# EAGLE board Waveform_Gen_V1.0 (EAGLE 9.0.1)
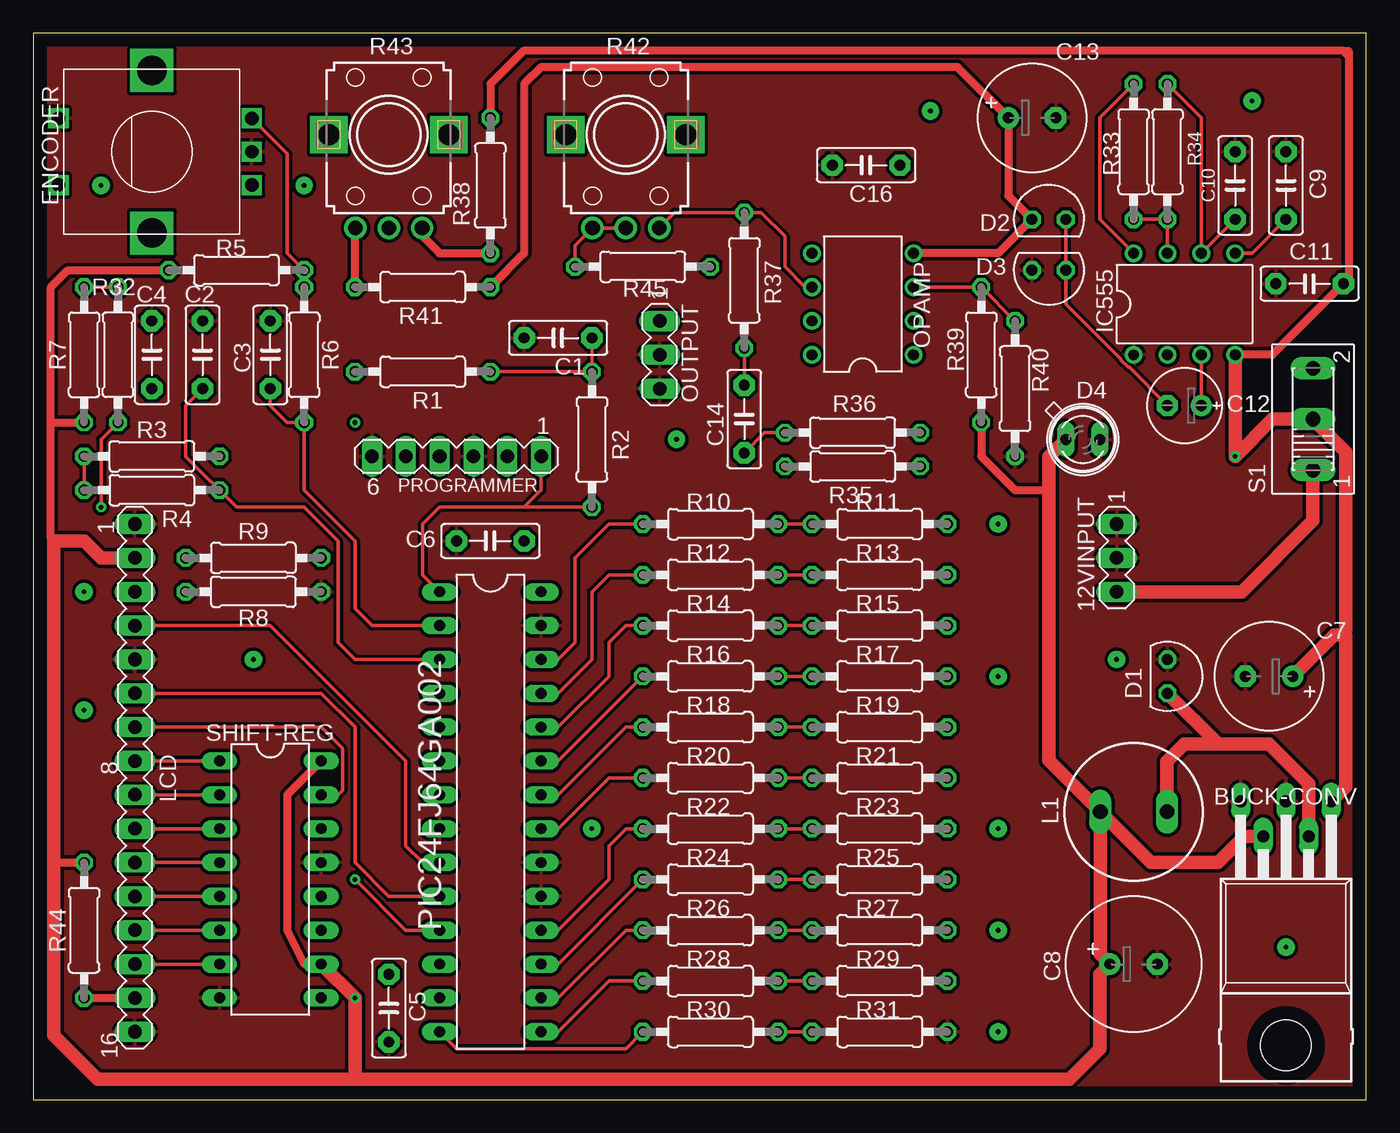
[diagram p0: board, top side]
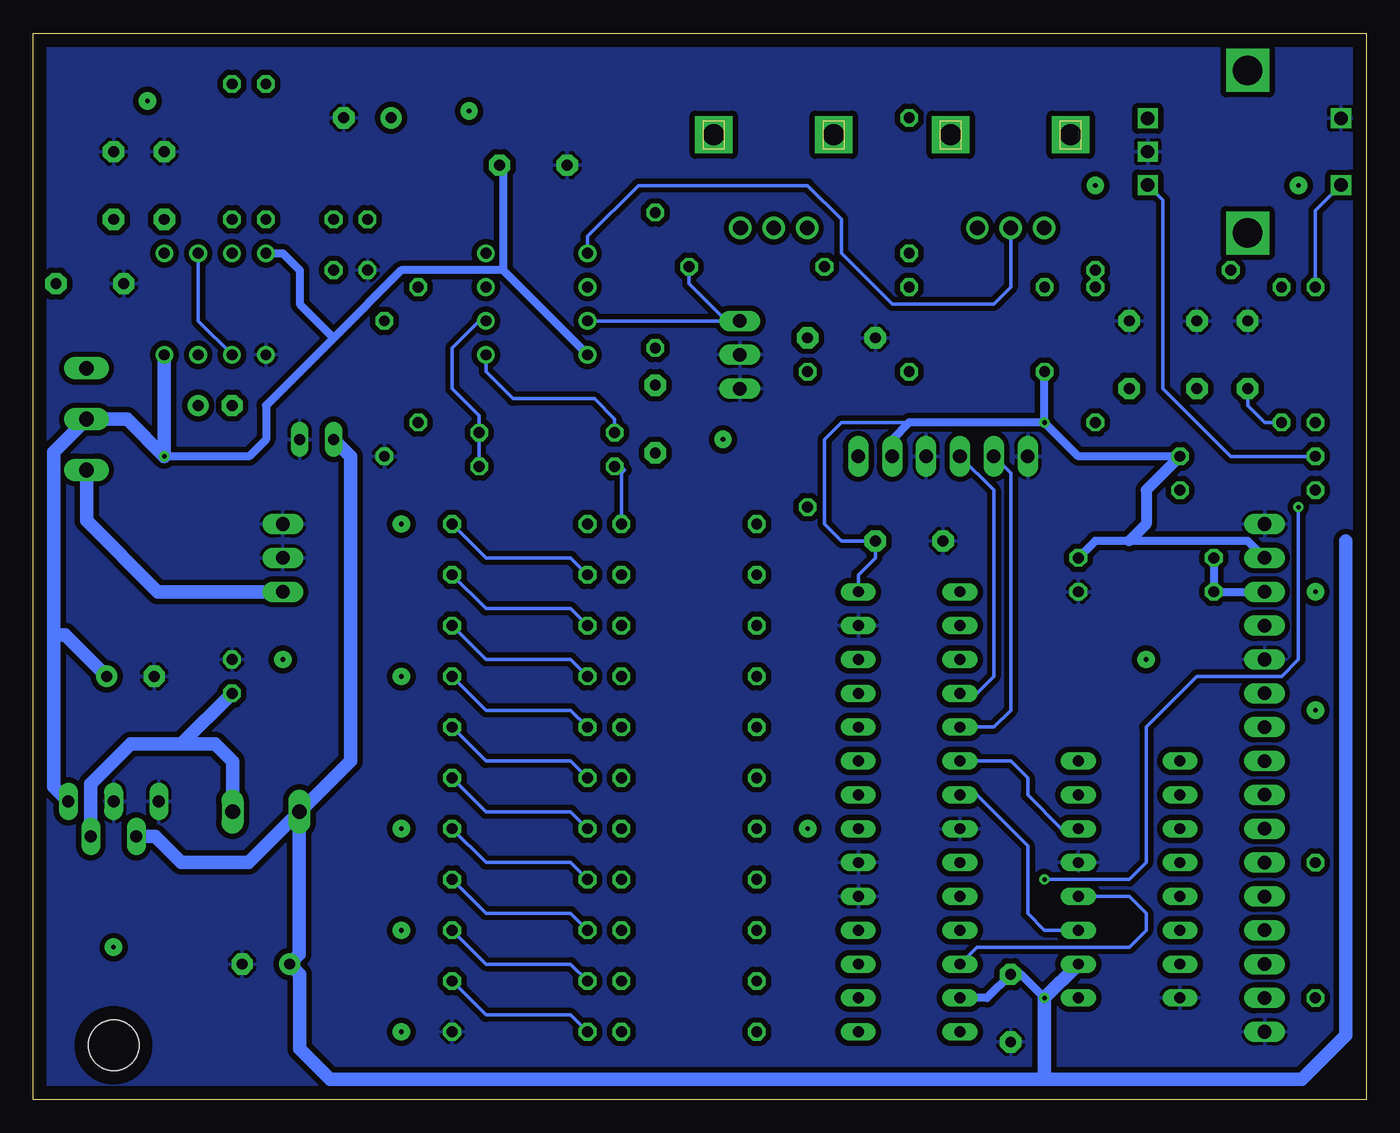
[diagram p1: board, bottom side, seen from below]

Size 100 x 80 mm. Coordinates in mm from the lower left corner, seen from the top.
Outline: 0,0 100,0 100,80 0,80 0,0
Copper layers (1*16): Top 0.035mm / dielectric 1.5mm / Bottom 0.035mm
Design rules "default": minimum track width 6mil, minimum drill 0.35mm, track to track 6mil, track to pad 6mil, pad to pad 6mil, via to via 6mil, smd to smd 6mil, copper to edge 40mil, drill to drill 6mil, minimum pad ring 10mil, minimum via ring 8mil, stop-mask expansion 4mil, vias tented up to drill 0mil, thermal gap 10mil

## Footprints (pad centres in the part's own frame; a part is rotated, then mirrored left to right if it is on the bottom)
MA03-1 = drill 1.016 long: 1 -2.54,0; 2 0,0; 3 2.54,0
TO220-52 = drill 0.9 long: 1 -3.4,-21.1; 2 -1.7,-18.47; 3 0,-21.1; 4 1.7,-18.47; 5 3.4,-21.1 | hole 3.8: 0,-2.8
C5B2.5 = drill 0.813 pad 1.6 octagon: 1 -2.54,0; 2 2.54,0
E3,5-8 = drill 0.813 pad 1.6: + -1.778,0 | drill 0.813 pad 1.6 octagon: - 1.778,0
E3,5-10 = drill 0.813 pad 1.6: + -1.778,0 | drill 0.813 pad 1.6 octagon: - 1.778,0
E2,5-6E = drill 0.813 pad 1.575: + -1.27,0 | drill 0.813 pad 1.575 octagon: - 1.27,0
TO92H = drill 0.813 octagon: 1 -1.27,0; 2 1.27,0
SFH482 = drill 0.813 long: A -1.27,0; K 1.27,0
ALPS_EC12E_SW = drill 1 square: A -2.5,-7.5; B 2.5,-7.5; C 0,-7.5; D -2.5,7; E 2.5,7 | drill 2.2 square: GND1 -6.1,0; GND2 6.1,0
DIL08 = drill 0.813 pad 1.27: 1 -3.81,-3.81; 2 -1.27,-3.81; 3 1.27,-3.81; 4 3.81,-3.81; 5 3.81,3.81; 6 1.27,3.81; 7 -1.27,3.81; 8 -3.81,3.81
SD12K100 = drill 1.1 long: 1 -2.5,0; 2 2.5,0
SIL16 = drill 1.016 long: 1 -24.13,0; 2 -21.59,0; 3 -19.05,0; 4 -16.51,0; 5 -13.97,0; 6 -11.43,0; 7 -8.89,0; 8 -6.35,0; 9 -3.81,0; 10 -1.27,0; 11 1.27,0; 12 3.81,0; 13 6.35,0; 14 8.89,0; 15 11.43,0; 20 13.97,0
DIL28-3 = drill 0.813 long: 1 -16.51,-3.81; 2 -13.97,-3.81; 3 -11.43,-3.81; 4 -8.89,-3.81; 5 -6.35,-3.81; 6 -3.81,-3.81; 7 -1.27,-3.81; 8 1.27,-3.81; 9 3.81,-3.81; 10 6.35,-3.81; 11 8.89,-3.81; 12 11.43,-3.81; 13 13.97,-3.81; 14 16.51,-3.81; 15 16.51,3.81; 16 13.97,3.81; 17 11.43,3.81; 18 8.89,3.81; 19 6.35,3.81; 20 3.81,3.81; 21 1.27,3.81; 22 -1.27,3.81; 23 -3.81,3.81; 24 -6.35,3.81; 25 -8.89,3.81; 26 -11.43,3.81; 27 -13.97,3.81; 28 -16.51,3.81
MA06-1 = drill 1.016 long: 1 -6.35,0; 2 -3.81,0; 3 -1.27,0; 4 1.27,0; 5 3.81,0; 6 6.35,0
0207/10 = drill 0.813 octagon: 1 -5.08,0; 2 5.08,0
EVUF = drill 1.1 pad 1.676: 1 -2.5,-7; 2 0,-7; 3 2.5,-7 | drill 1.6 pad 2.8 square: M1 4.5,0; M2 -4.5,0
255SB = drill 1.118 long: 1 -3.81,0; 2 0,0; 3 3.81,0
DIL16 = drill 0.813 long: 1 -8.89,-3.81; 2 -6.35,-3.81; 3 -3.81,-3.81; 4 -1.27,-3.81; 5 1.27,-3.81; 6 3.81,-3.81; 7 6.35,-3.81; 8 8.89,-3.81; 9 8.89,3.81; 10 6.35,3.81; 11 3.81,3.81; 12 1.27,3.81; 13 -1.27,3.81; 14 -3.81,3.81; 15 -6.35,3.81; 16 -8.89,3.81

## Placement (x,y rotation side)
12VINPUT  [MA03-1]  81.28,40.64 270 top
BUCK-CONV  [TO220-52]  93.98,1.27 180 top
C1  0.1 uF 50V  [C5B2.5]  39.37,57.15 180 top
C2  0.1 uF 50V  [C5B2.5]  12.7,55.88 90 top
C3  [C5B2.5]  17.78,55.88 90 top
C4  0.1 uF 50V  [C5B2.5]  8.89,55.88 90 top
C5  0.1 uF 50V  [C5B2.5]  26.67,6.86 270 top
C6  0.1 uF 50V  [C5B2.5]  34.29,41.91 180 top
C7  100uF  [E3,5-8]  92.71,31.75 180 top
C8  330uF  [E3,5-10]  82.55,10.16 0 top
C9  100nF  [C5B2.5]  93.98,68.58 90 top
C10  10nF  [C5B2.5]  90.17,68.58 90 top
C11  10nF  [C5B2.5]  95.76,61.21 180 top
C12  10uF  [E2,5-6E]  86.36,52.07 180 top
C13  100uF  [E3,5-8]  74.93,73.66 0 top
C14  0.1 uF 50V  [C5B2.5]  53.34,51.05 90 top
C16  10nF  [C5B2.5]  62.48,70.1 180 top
D1  [TO92H]  85.09,31.75 270 top
D2  [TO92H]  76.2,66.04 0 top
D3  [TO92H]  76.2,62.23 180 top
D4  [SFH482]  78.74,49.53 0 top
ENCODER  [ALPS_EC12E_SW]  8.89,71.12 90 top
IC555  [DIL08]  86.36,59.69 0 top
L1  330uH  [SD12K100]  82.55,21.59 180 top
LCD  LCD_PIN  [SIL16]  7.62,19.05 270 top
OPAMP  LM6178LMN  [DIL08]  62.23,59.69 90 top
OUTPUT  [MA03-1]  46.99,55.88 270 top
PIC24FJ64GA002  [DIL28-3]  34.29,21.59 270 top
PROGRAMMER  [MA06-1]  31.75,48.26 180 top
R1  10K  [0207/10]  29.21,54.61 180 top
R2  330  [0207/10]  41.91,49.53 270 top
R3  10K  [0207/10]  8.89,48.26 0 top
R4  10K  [0207/10]  8.89,45.72 180 top
R5  10K  [0207/10]  15.24,62.23 180 top
R6  10K  [0207/10]  20.32,55.88 90 top
R7  10K  [0207/10]  3.81,55.88 270 top
R8  TBD  [0207/10]  16.51,38.1 0 top
R9  TBD  [0207/10]  16.51,40.64 180 top
R10  20K  [0207/10]  50.8,43.18 180 top
R11  10K  [0207/10]  63.5,43.18 180 top
R12  20K  [0207/10]  50.8,39.37 180 top
R13  10K  [0207/10]  63.5,39.37 180 top
R14  20K  [0207/10]  50.8,35.56 180 top
R15  10K  [0207/10]  63.5,35.56 180 top
R16  20K  [0207/10]  50.8,31.75 180 top
R17  10K  [0207/10]  63.5,31.75 180 top
R18  20K  [0207/10]  50.8,27.94 180 top
R19  10K  [0207/10]  63.5,27.94 180 top
R20  20K  [0207/10]  50.8,24.13 180 top
R21  10K  [0207/10]  63.5,24.13 180 top
R22  20K  [0207/10]  50.8,20.32 180 top
R23  10K  [0207/10]  63.5,20.32 180 top
R24  20K  [0207/10]  50.8,16.51 180 top
R25  10K  [0207/10]  63.5,16.51 180 top
R26  20K  [0207/10]  50.8,12.7 180 top
R27  10K  [0207/10]  63.5,12.7 180 top
R28  20K  [0207/10]  50.8,8.89 180 top
R29  10K  [0207/10]  63.5,8.89 180 top
R30  20K  [0207/10]  50.8,5.08 180 top
R31  20K  [0207/10]  63.5,5.08 180 top
R32  10K  [0207/10]  6.35,55.88 90 top
R33  5.6K  [0207/10]  82.55,71.12 270 top
R34  47K  [0207/10]  85.09,71.12 270 top
R35  10K  [0207/10]  61.47,47.5 180 top
R36  2K  [0207/10]  61.47,50.04 0 top
R37  20K  [0207/10]  53.34,61.47 270 top
R38  20K  [0207/10]  34.29,68.58 90 top
R39  40K  [0207/10]  71.12,55.88 270 top
R40  10K  [0207/10]  73.66,53.34 90 top
R41  20K  [0207/10]  29.21,60.96 180 top
R42  200K POT  [EVUF]  44.45,72.39 0 top
R43  200K POT  [EVUF]  26.67,72.39 0 top
R44  10K  [0207/10]  3.81,12.7 270 top
R45  1K  [0207/10]  45.72,62.48 0 top
S1  [255SB]  96.01,51.05 90 top
SHIFT-REG  74HC595  [DIL16]  17.78,16.51 270 top

## Library data of the parts
12VINPUT OUTPUT PROGRAMMER = con-lstb; OC_FARNELL: unknown; OC_NEWARK: unknown
BUCK-CONV = linear
C1-C6 C9-C11 C14 C16 = capacitor-wima
C7 C8 C12 C13 = rcl; SPICEPREFIX: C
D1-D3 = diode
D4 = led
ENCODER = switch-alps; MPN: EC12E2424407; OC_FARNELL: 1520813; OC_NEWARK: 74M1068
IC555 LCD OPAMP SHIFT-REG = Waveform_Gen_V1.0
L1 = inductor-neosid; OC_FARNELL: unknown; OC_NEWARK: unknown
PIC24FJ64GA002 = Waveform_Gen_V1.0; MPN: PIC24FJ64GA002-I/SP; OC_FARNELL: 1332298; OC_NEWARK: 88K6132
R1-R41 R44 R45 = eagle-ltspice; SPICEMODEL: NONE; SPICEPREFIX: R
R42 R43 = pot
S1 = switch

## Nets
+5V: BUCK-CONV.4 C5.1 C6.1 C8.+ D4.A L1.2 LCD.2 PIC24FJ64GA002.13 PIC24FJ64GA002.28 PROGRAMMER.2 R1.2 R3.2 R5.2 R7.2 R9.1 R39.2 R44.1 SHIFT-REG.10 SHIFT-REG.16
+12V: BUCK-CONV.1 C7.+ C11.1 C16.1 IC555.4 IC555.8 OPAMP.8 R33.1 R38.2 S1.2
-12V: C13.+ D2.1 OPAMP.4 R41.1
GND: 12VINPUT.1 12VINPUT.2 BUCK-CONV.3 BUCK-CONV.5 C1.2 C2.2 C3.2 C4.2 C5.2 C6.2 C7.- C8.- C9.2 C10.2 C11.2 C13.- C16.2 D1.1 D3.2 D4.K ENCODER.C ENCODER.E IC555.1 LCD.1 LCD.5 LCD.20 OUTPUT.2 OUTPUT.3 PIC24FJ64GA002.8 PIC24FJ64GA002.19 PIC24FJ64GA002.20 PIC24FJ64GA002.27 PROGRAMMER.3 PROGRAMMER.6 R8.2 R31.1 R40.1 SHIFT-REG.8 SHIFT-REG.13
N$1: PIC24FJ64GA002.7 SHIFT-REG.11
N$2: PIC24FJ64GA002.6 SHIFT-REG.14
N$3: PIC24FJ64GA002.12 SHIFT-REG.12
N$4: R42.1 R42.2 R45.1
N$5: C3.1 PIC24FJ64GA002.2 R6.1
N$6: ENCODER.A R3.1 R4.2
N$7: PIC24FJ64GA002.1 PROGRAMMER.1 R2.2
N$8: C1.1 R1.1 R2.1
N$9: ENCODER.D R7.1 R32.2
N$10: PIC24FJ64GA002.26 R10.2
N$11: C2.1 PIC24FJ64GA002.3 R4.1
N$12: ENCODER.B R5.1 R6.2
N$13: C4.1 PIC24FJ64GA002.11 R32.1
N$14: PIC24FJ64GA002.4 PROGRAMMER.4
N$15: PIC24FJ64GA002.5 PROGRAMMER.5
N$17: R10.1 R11.2 R35.2
N$18: PIC24FJ64GA002.25 R12.2
N$19: R11.1 R12.1 R13.2
N$20: R13.1 R14.1 R15.2
N$21: R15.1 R16.1 R17.2
N$22: R17.1 R18.1 R19.2
N$23: R19.1 R20.1 R21.2
N$24: R21.1 R22.1 R23.2
N$25: R23.1 R24.1 R25.2
N$26: R25.1 R26.1 R27.2
N$27: R27.1 R28.1 R29.2
N$28: R29.1 R30.1 R31.2
N$29: PIC24FJ64GA002.24 R14.2
N$30: PIC24FJ64GA002.23 R16.2
N$31: PIC24FJ64GA002.22 R18.2
N$32: PIC24FJ64GA002.21 R20.2
N$33: PIC24FJ64GA002.18 R22.2
N$34: PIC24FJ64GA002.17 R24.2
N$35: PIC24FJ64GA002.16 R26.2
N$36: PIC24FJ64GA002.15 R28.2
N$37: LCD.7 SHIFT-REG.15
N$38: PIC24FJ64GA002.14 R30.2
N$39: LCD.8 SHIFT-REG.1
N$40: LCD.9 SHIFT-REG.2
N$41: LCD.10 SHIFT-REG.3
N$42: LCD.11 SHIFT-REG.4
N$43: LCD.12 SHIFT-REG.5
N$44: LCD.13 SHIFT-REG.6
N$45: LCD.14 SHIFT-REG.7
N$46: LCD.3 R8.1 R9.2
N$47: LCD.4 PIC24FJ64GA002.9
N$48: LCD.6 PIC24FJ64GA002.10
N$49: BUCK-CONV.2 D1.2 L1.1
N$50: LCD.15 R44.2
N$52: C10.1 IC555.2 IC555.6 R34.1
N$53: C12.- D2.2 D3.1
N$54: C9.1 IC555.5
N$57: IC555.7 R33.2 R34.2
N$58: C12.+ IC555.3
N$60: OPAMP.2 R35.1 R36.2
N$61: C14.1 OPAMP.1 R36.1
N$62: OPAMP.3 R39.1 R40.2
N$63: OPAMP.6 R37.1 R42.3
N$64: R38.1 R43.3
N$65: OPAMP.7 OUTPUT.1 R45.2
N$67: OPAMP.5 R43.2
N$68: R41.2 R43.1
N$76: 12VINPUT.3 S1.1
N$80: C14.2 R37.2

## Tracks (layer width: path | path; a pad name or v marks a point on that pad's centre or on a via)
+5V  (via drill 0.35 pad 0.55)
  Top 0.61: SHIFT-REG.16 19.05,22.86 19.05,12.7 20.32,10.16 SHIFT-REG.10 | 1.52,17.78 R44.1 | 1.52,41.91 1.32,42.11 1.32,50.8 | 1.32,50.8 1.32,60.96 2.59,62.23 R5.2 | 1.32,50.8 R7.2 | R39.2 71.12,48.26 73.66,45.72 76.2,45.72
  Top 1.016: L1.2 80.05,10.88 C8.+ 80.01,9.4 80.01,3.81 77.72,1.52 24.13,1.52 | BUCK-CONV.4 90.86,19.74 88.9,17.78 83.86,17.78 L1.2 | 24.13,1.52 4.83,1.52 1.52,4.83 1.52,17.78 1.52,41.91 3.81,41.91 5.08,40.64 LCD.2 | SHIFT-REG.10 v24.13,7.62 24.13,1.52 | L1.2 76.2,25.44 76.2,45.72 76.2,48.26 D4.A
  Bottom 0.152: 31.75,7.62 PIC24FJ64GA002.13
  Bottom 0.254: 34.29,50.8 39.37,50.8 40.64,49.53 40.64,43.18 39.37,41.91 C6.1 36.83,40.64 38.1,39.37 PIC24FJ64GA002.28
  Bottom 0.61: R3.2 21.59,48.26 v24.13,50.8 | v24.13,50.8 R1.2 | v24.13,50.8 34.29,50.8 35.56,49.53 PROGRAMMER.2 | LCD.2 8.89,41.91 17.78,41.91 20.32,41.91 R9.1 | v24.13,7.62 25.91,9.4 C5.1 28.45,7.62 PIC24FJ64GA002.13
  Bottom 0.813: R3.2 16.51,45.72 16.51,43.18 17.78,41.91
  Bottom 1.016: SHIFT-REG.10 v24.13,7.62 24.13,1.52 | 1.52,41.91 1.52,4.83 4.83,1.52 24.13,1.52 | 24.13,1.52 77.72,1.52 80.01,3.81 80.01,9.4 C8.+ 80.05,10.88 L1.2 | L1.2 83.86,17.78 88.9,17.78 90.86,19.74 BUCK-CONV.4 | D4.A 76.2,48.26 76.2,25.4 80.01,21.59 L1.2
+12V  (via drill 0.35)
  Top 0.254: IC555.8 80.01,66.04 80.01,73.66 R33.1
  Top 0.61: R38.2 34.29,76.2 36.77,78.68 98.3,78.68 | 98.3,78.68 98.68,78.68 98.68,78.3 | 98.3,78.68 98.68,78.3 | 98.68,78.3 98.68,61.59 C11.1 92.96,55.88 IC555.4
  Top 1.016: BUCK-CONV.1 98.48,23.47 98.48,34.87 97.61,34.87 C7.+ 95.25,32.51 | IC555.4 v90.17,48.26 92.96,51.05 S1.2 98.48,48.59 98.48,35.23 98.3,35.05
  Bottom 0.61: OPAMP.8 64.77,62.23 | 77.47,57.15 72.39,62.23 64.77,62.23 | 77.47,57.15 82.55,52.07 82.55,49.53 83.82,48.26 v90.17,48.26 | IC555.8 81.28,63.5 80.01,62.23 80.01,59.69 77.47,57.15 | C16.1 64.77,69.85 64.77,62.23
  Bottom 1.016: 95.25,32.51 C7.+ 97.61,34.87 98.48,34.87 | BUCK-CONV.1 98.48,23.47 98.48,34.87 | 98.48,34.87 98.48,48.59 S1.2 92.96,51.05 v90.17,48.26 IC555.4
-12V
  Top 0.61: OPAMP.4 72.39,63.5 D2.1 73.15,67.82 C13.+ 69.34,77.47 38.1,77.47 36.83,76.2 36.83,63.5 R41.1
GND
  pour Bottom (isolate 0.406): 0,80.01 100.33,80.01 100.33,0 0,0
  pour Top (isolate 0.254): 0,80.01 100.33,80.01 100.33,0 0,0
N$1
  Bottom 0.254: PIC24FJ64GA002.7 29.21,22.86 25.4,19.05 25.4,13.97 24.13,12.7 SHIFT-REG.11
N$2
  Bottom 0.152: 27.94,25.4 PIC24FJ64GA002.6
  Bottom 0.254: PIC24FJ64GA002.6 26.67,25.4 25.4,24.13 25.4,22.86 22.86,20.32 SHIFT-REG.14
N$3
  Bottom 0.254: SHIFT-REG.12 17.78,15.24 16.51,13.97 16.51,12.7 17.78,11.43 29.21,11.43 PIC24FJ64GA002.12
N$4
  Top 0.254: R42.2 R42.1 40.64,64.08 R45.1
N$5
  Top 0.254: C3.1 17.78,52.07 19.05,50.8 R6.1 20.32,45.72 24.13,41.91 24.13,36.83 25.4,35.56 PIC24FJ64GA002.2
N$6
  Top 0.254: R3.1 R4.2
  Bottom 0.254: ENCODER.A 15.24,67.47 15.24,53.34 10.16,48.26 R3.1
N$7
  Top 0.254: R2.2 36.83,44.45 | 36.83,44.45 30.48,44.45 29.21,43.18 29.21,39.37 PIC24FJ64GA002.1 | PROGRAMMER.1 38.1,45.72 36.83,44.45
N$8
  Top 0.254: R1.1 R2.1 C1.1
N$9
  Top 0.254: R7.1 R32.2
  Bottom 0.254: R7.1 3.81,66.7 ENCODER.D
N$10
  Top 0.254: PIC24FJ64GA002.26 39.37,33.02 40.64,34.29 40.64,40.64 43.18,43.18 R10.2
N$11
  Top 0.152: 11.43,48.26 R4.1 15.24,44.45
  Top 0.254: C2.1 11.43,52.07 11.43,48.26 15.24,44.45 20.32,44.45 22.86,41.91 22.86,34.29 24.13,33.02 PIC24FJ64GA002.3
N$12
  Top 0.152: 18.97,71.04 19.05,70.96 | R5.1 R6.2
  Top 0.254: ENCODER.B 18.97,71.04 | 19.05,70.96 19.05,63.5 R5.1
N$13  (via drill 0.35 pad 0.55)
  Top 0.254: R32.1 5.08,49.53 v5.08,44.45 | v24.13,16.51 27.94,12.7 PIC24FJ64GA002.11
  Bottom 0.254: C4.1 8.89,52.07 7.62,50.8 R32.1 | v5.08,44.45 5.08,33.02 6.35,31.75 12.7,31.75 16.51,27.94 16.51,17.78 17.78,16.51 v24.13,16.51
N$14
  Bottom 0.254: PROGRAMMER.4 27.94,45.72 27.94,31.75 29.21,30.48 PIC24FJ64GA002.4
N$15
  Bottom 0.254: PROGRAMMER.5 26.67,46.99 26.67,29.21 27.94,27.94 PIC24FJ64GA002.5
N$16  (via drill 0.35 pad 1.3)
  other vias: 72.39,5.08
N$17
  Top 0.254: R10.1 R11.2
  Bottom 0.254: R10.1 55.88,46.99 55.63,47.24 55.88,47.5 R35.2
N$18
  Top 0.152: 39.37,30.48 PIC24FJ64GA002.25
  Top 0.254: R12.2 43.18,39.37 41.91,38.1 41.91,33.02 39.37,30.48
N$19
  Top 0.254: R12.1 R13.2
  Bottom 0.254: R11.1 66.04,40.64 59.69,40.64 R13.2
N$20
  Top 0.254: R14.1 R15.2
  Bottom 0.254: R13.1 66.04,36.83 59.69,36.83 R15.2
N$21
  Top 0.254: R16.1 R17.2
  Bottom 0.254: R15.1 66.04,33.02 59.69,33.02 R17.2
N$22
  Top 0.254: R18.1 R19.2
  Bottom 0.254: R17.1 66.04,29.21 59.69,29.21 R19.2
N$23
  Top 0.254: R20.1 R21.2
  Bottom 0.254: R19.1 66.04,25.4 59.69,25.4 R21.2
N$24
  Top 0.254: R22.1 R23.2
  Bottom 0.254: R23.2 59.69,21.59 66.04,21.59 R21.1
N$25
  Top 0.254: R24.1 R25.2
  Bottom 0.254: R23.1 66.04,17.78 59.69,17.78 R25.2
N$26
  Top 0.254: R26.1 R27.2
  Bottom 0.254: R27.2 59.69,13.97 66.04,13.97 R25.1
N$27
  Top 0.254: R28.1 R29.2
  Bottom 0.254: R27.1 66.04,10.16 59.69,10.16 R29.2
N$28
  Top 0.254: R30.1 R31.2
  Bottom 0.254: R31.2 59.69,6.35 66.04,6.35 R29.1
N$29
  Top 0.254: PIC24FJ64GA002.24 39.37,27.94 43.18,31.75 43.18,34.29 44.45,35.56 R14.2
N$30
  Top 0.254: R16.2 39.37,25.4 PIC24FJ64GA002.23
N$31
  Top 0.254: PIC24FJ64GA002.22 39.37,22.86 44.45,27.94 R18.2
N$32
  Top 0.254: R20.2 43.18,24.13 39.37,20.32 PIC24FJ64GA002.21
N$33
  Top 0.254: R22.2 44.45,20.32 43.18,19.05 43.18,16.51 39.37,12.7 PIC24FJ64GA002.18
N$34
  Top 0.254: R24.2 39.37,10.16 PIC24FJ64GA002.17
N$35
  Top 0.254: R26.2 44.45,12.7 39.37,7.62 PIC24FJ64GA002.16
N$36
  Top 0.254: PIC24FJ64GA002.15 39.37,5.08 43.18,8.89 R28.2
N$37
  Top 0.254: LCD.7 21.59,27.94 23.19,26.34 23.19,23.19 22.86,22.86 SHIFT-REG.15
N$38
  Top 0.254: PIC24FJ64GA002.14 31.75,3.81 44.45,3.81 R30.2
N$39
  Top 0.254: SHIFT-REG.1 LCD.8
N$40
  Top 0.254: LCD.9 SHIFT-REG.2
N$41
  Top 0.254: SHIFT-REG.3 LCD.10
N$42
  Top 0.254: LCD.11 SHIFT-REG.4
N$43
  Top 0.254: SHIFT-REG.5 LCD.12
N$44
  Top 0.254: SHIFT-REG.6 LCD.13
N$45
  Top 0.254: LCD.14 SHIFT-REG.7
N$46
  Bottom 0.61: R9.2 R8.1 LCD.3
N$47
  Top 0.254: LCD.4 17.78,35.56 27.94,25.4 27.94,19.05 29.21,17.78 PIC24FJ64GA002.9
N$48
  Top 0.254: LCD.6 21.59,30.48 24.13,27.94 24.13,17.78 26.67,15.24 PIC24FJ64GA002.10
N$49
  Top 1.016: D1.2 88.9,26.67 | 88.9,26.67 92.71,26.67 95.68,23.7 BUCK-CONV.2 | 88.9,26.67 86.36,26.67 85.05,25.36 L1.1
  Bottom 1.016: BUCK-CONV.2 95.68,23.7 92.71,26.67 88.9,26.67 | 88.9,26.67 86.36,26.67 85.05,25.36 L1.1 | D1.2 88.9,26.67
N$50
  Top 0.61: R44.2 LCD.15
N$51  (via drill 0.35 pad 1.3)
  other vias: 72.39,12.7
N$52
  Top 0.254: C10.1 IC555.6 87.63,73.66 R34.1
  Bottom 0.254: IC555.6 87.63,58.42 IC555.2
N$53
  Top 0.254: D2.2 D3.1 77.47,59.69 81.61,55.55 81.61,55.49 82.16,54.94 82.22,54.94 C12.-
N$54
  Top 0.254: IC555.5 91.44,63.5 C9.1
N$55  (via drill 0.35 pad 1.3)
  other vias: 72.39,43.18
N$56  (via drill 0.35 pad 1.3)
  other vias: 72.39,31.75
N$57
  Top 0.254: IC555.7 R34.2 R33.2
N$58
  Top 0.254: IC555.3 C12.+
N$59  (via drill 0.35 pad 1.3)
  other vias: 72.39,20.32
N$60
  Bottom 0.254: R35.1 R36.2 66.55,51.31 68.58,53.34 68.58,56.39 66.29,58.67 OPAMP.2
N$61
  Top 0.254: C14.1 54.86,50.04 R36.1
  Bottom 0.254: R36.1 56.39,51.05 57.91,52.58 64.01,52.58 66.04,54.61 OPAMP.1
N$62
  Top 0.254: OPAMP.3 R39.1 R40.2
N$63
  Top 0.254: R42.3 48.11,66.55 R37.1 54.61,66.55 56.39,64.77 56.39,62.48 57.91,60.96 OPAMP.6
N$64
  Top 0.61: R43.3 29.17,64.81 30.48,63.5 R38.1
N$65
  Bottom 0.254: OUTPUT.1 48.01,58.42 | 48.01,58.42 OPAMP.7 | R45.2 50.8,61.21 48.01,58.42
N$66  (via drill 0.35 pad 1.3)
  other vias: 67.31,74.17
N$67
  Bottom 0.254: R43.2 26.67,60.96 27.94,59.69 35.56,59.69 39.37,63.5 39.37,66.04 41.91,68.58 54.61,68.58 58.42,64.77 OPAMP.5
N$68
  Top 0.61: R41.2 24.13,65.35
  Top 1.016: R43.1 24.13,65.35
N$69  (via drill 0.35 pad 1.3)
  other vias: 91.44,74.93
N$70  (via drill 0.35 pad 1.3)
  other vias: 5.08,68.58
N$71  (via drill 0.35 pad 1.3)
  other vias: 20.32,68.58
N$72  (via drill 0.35 pad 1.3)
  other vias: 3.81,38.1
N$73  (via drill 0.35 pad 1.3)
  other vias: 3.81,29.21
N$74  (via drill 0.35 pad 1.3)
  other vias: 16.51,33.02
N$75  (via drill 0.35 pad 1.3)
  other vias: 48.26,49.53
N$76
  Top 1.016: S1.1 96.01,43.43 90.68,38.1 12VINPUT.3
  Bottom 1.016: S1.1 96.01,43.43 90.68,38.1 12VINPUT.3
N$77  (via drill 0.35 pad 1.3)
  other vias: 81.28,33.02
N$78  (via drill 0.35 pad 1.3)
  other vias: 93.98,11.43
N$79  (via drill 0.35 pad 1.3)
  other vias: 41.91,20.32
N$80
  Top 0.254: R37.2 C14.2